# Altium PCB PCB.PcbDoc
Units mil, origin at the board's own origin, x right, y up, seen from the top; angles counter-clockwise.
Board outline 1476.38 x 748.48 mil, 2 copper layers (Top Layer, Bottom Layer); 14 components, 17 nets, 47 pads, 0 vias.
Unrouted connection lines stored in the file: 31.
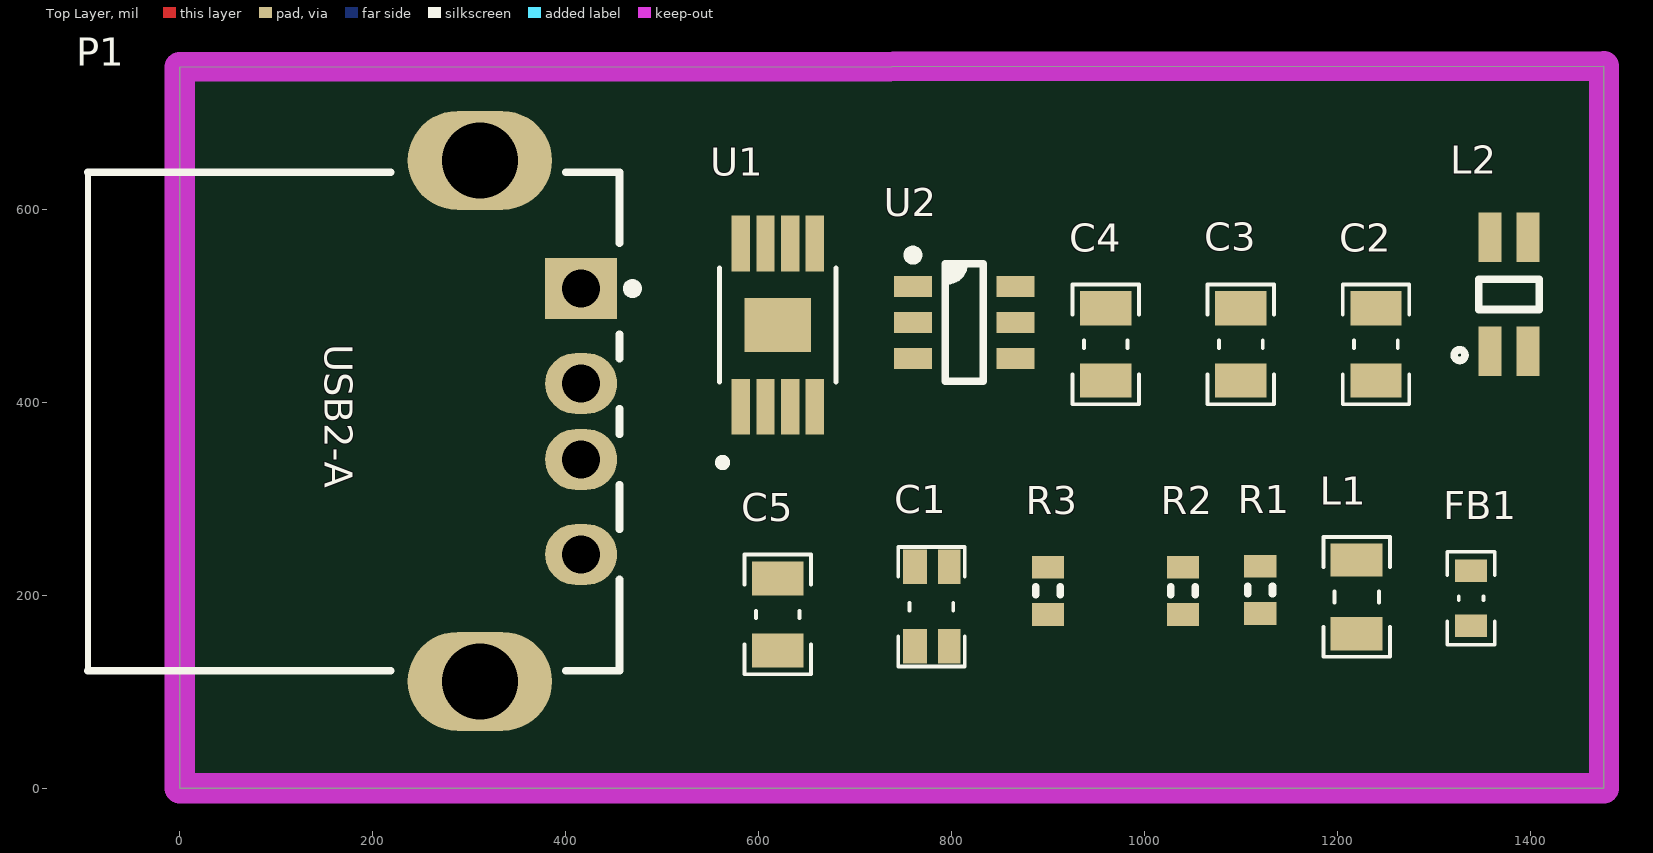
[diagram p0: Top Layer view]
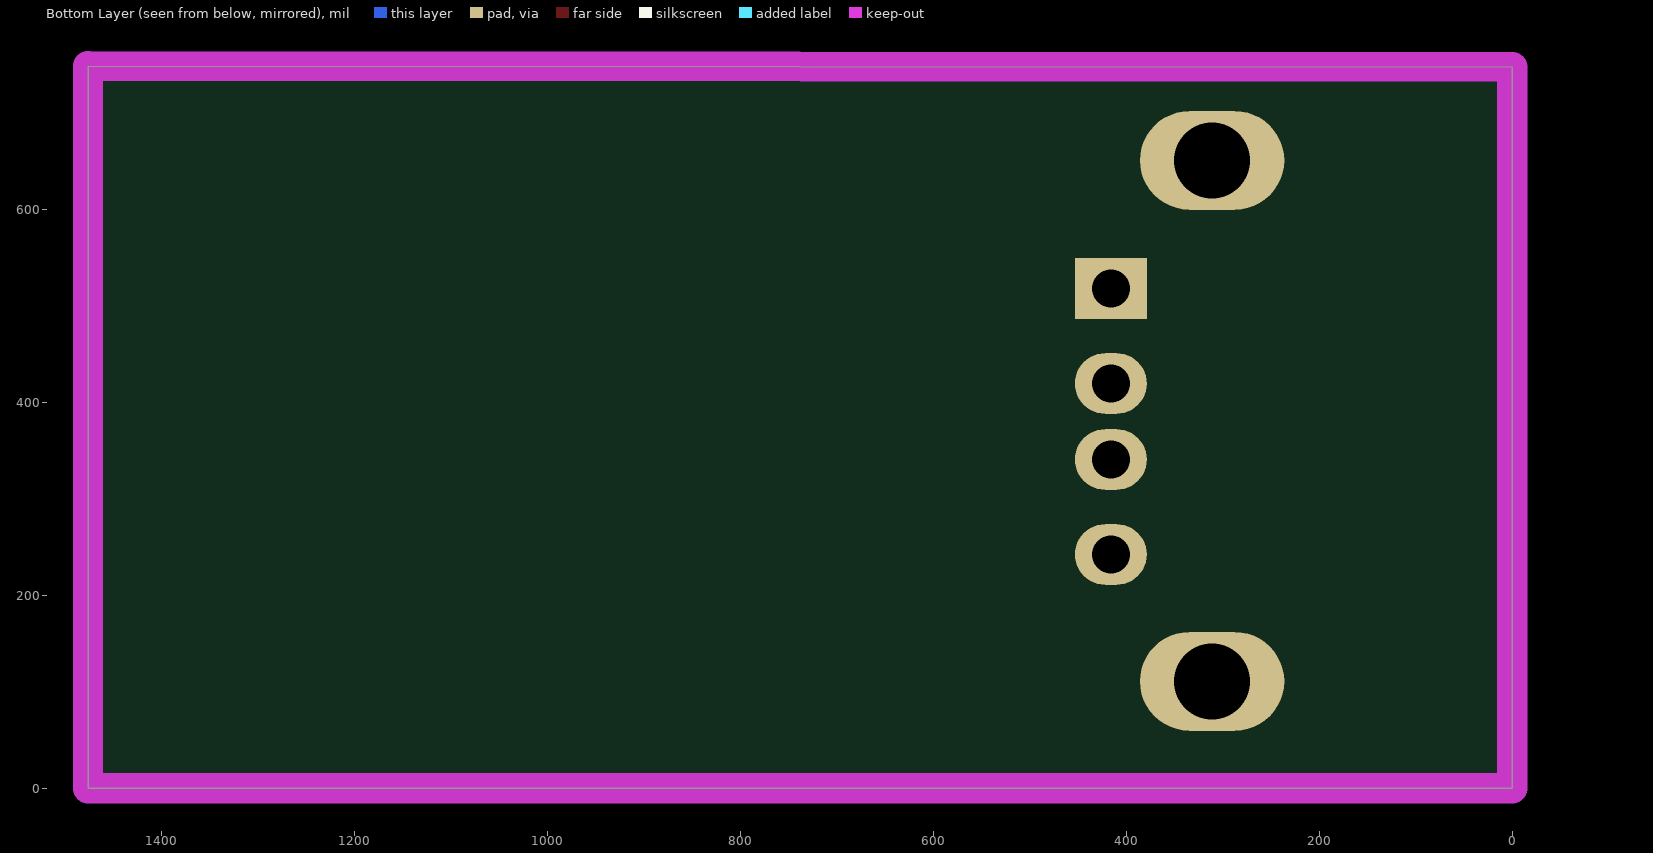
[diagram p1: Bottom Layer view, seen from below]

## Layer stack, top to bottom
Top Solder: solder mask 0.4, Solder Resist, Dk 3.5
Top Layer: signal copper 1.4
Dielectric 1: dielectric 12.6, FR-4, Dk 4.8
Bottom Layer: signal copper 1.4
Bottom Solder: solder mask 0.4, Solder Resist, Dk 3.5

## Board outline
0,0 0,747.46 1476.38,748.48 1476.38,0

## Design rules (kind name [scope] priority, off if disabled: settings)
Clearance [All] p1: gap=6 ignorepadtopadclearanceinfootprint=TRUE except(0: Arc-Hole Track-Hole SMDPad-Hole THPad-Hole Via-Hole Fill-Hole Poly-Hole Region-Hole Text-Hole)
DiffPairsRouting [All] p1: maxlimit=10 minlimit=10 mostfreqgap=10 substack1={008B043B-99C8-4B85-BA06-E00815DD0703} toplayer_{008b043b-99c8-4b85-ba06-e00815dd0703}_minwidth=15 toplayer_{008b043b-99c8-4b85-ba06-e00815dd0703}_maxwidth=15 toplayer_{008b043b-99c8-4b85-ba06-e00815dd0703}_prefwidth=15 bottomlayer_{008b043b-99c8-4b85-ba06-e00815dd0703}_minwidth=15 bottomlayer_{008b043b-99c8-4b85-ba06-e00815dd0703}_maxwidth=15 bottomlayer_{008b043b-99c8-4b85-ba06-e00815dd0703}_prefwidth=15 toplayer_minwidth=8 toplayer_maxwidth=15 toplayer_prefwidth=15 bottomlayer_minwidth=8 bottomlayer_maxwidth=15 bottomlayer_prefwidth=15 substack2={6B2CEA5B-5D47-4527-8B06-B0CC68312985} toplayer_{6b2cea5b-5d47-4527-8b06-b0cc68312985}_minwidth=15 toplayer_{6b2cea5b-5d47-4527-8b06-b0cc68312985}_maxwidth=15 toplayer_{6b2cea5b-5d47-4527-8b06-b0cc68312985}_prefwidth=15 bottomlayer_{6b2cea5b-5d47-4527-8b06-b0cc68312985}_minwidth=15 bottomlayer_{6b2cea5b-5d47-4527-8b06-b0cc68312985}_maxwidth=15 bottomlayer_{6b2cea5b-5d47-4527-8b06-b0cc68312985}_prefwidth=15 maxuncoupledlength=1
HoleSize [All] p1: absolutevalues=TRUE maxlimit=1968.5 minlimit=1 maxpercent=80.000 minpercent=20.000
PlaneClearance [All] p1: clearance=10
PolygonConnect [All] p1: connectstyle=Direct reliefconductorwidth=10 reliefentries=4 polygonreliefangle="90 Angle" airgapwidth=10
RoomDefinition USB [InComponentClass('USB')] p1: confinementstyle=ConfineIn formatcopy=TRUE lockcomponents=FALSE outline 0,750 0,0 1480,0 1480,750
RoutingVias [All] p1: holewidth=16 width=28 viastyle="Through Hole" minholewidth=8 minwidth=16 maxholewidth=28 maxwidth=50
ShortCircuit [All] p1: allowed=TRUE
SilkToSilkClearance [All] p1: silktosilkclearance=2
SilkToSolderMaskClearance [IsPad] p1: minsilkscreentomaskgap=1 clearancetoexposedcopper=TRUE
SolderMaskExpansion [All] p1: expansion=4 istentingtop=FALSE
Width [All] p1: maxlimit=200 minlimit=11 preferedwidth=16 substack1={008B043B-99C8-4B85-BA06-E00815DD0703} substack2={6B2CEA5B-5D47-4527-8B06-B0CC68312985}
24 further rules are at their usual default settings.

## Classes and differential pairs
net class Undefined: NetR3_2 USB0_N USB0_P USB0_PWR
differential pair USB0: +USB0_P -USB0_N

## Components (designator, comment, footprint, x,y, rotation, side; value= is the part's Value field where it differs from the comment)
C1 "10uF" "CAP0805 - Low Noise" 779.25,188.05 r90 top
C2 "100nF" CAP0805 1240,460 r90 top
C3 "100uF" CAP0805 1100,460 r90 top
C4 "100nF" CAP0805 960,460 r90 top
C5 "100nF" CAP0805 620,180 r90 top
FB1 "742792651" FB0603 1338.58,196.85 r90 top
L1 "100uh" IND0805 1220,198.19 r270 top
L2 "744232090" IND_744232090 1377.95,511.81 r90 top
P1 "USB Connector" "USB2.5-2H4C Flash" 200,380 r180 top
R1 "5K" RES0603 1120,181.01 r90 top
R2 "10K" RES0603 1040,180 r90 top
R3 "10K" RES0603_(1608X06L) 900,180 r90 top
U1 "TPS2051 (DGN)" *SOP65P490X110-9N_PMIC-TPS2051BDGN(MSOP8)(Primary) 620,480 r90 top
U2 "TVS USBLC6P6" "TI SOT-23-6 DBV" 813.15,482.6 r0 top

## Footprints (in the part's own frame and the unit in brackets; to place one, negate y for a bottom-side part, rotate by r counter-clockwise, add the part's x,y. Pads: shape width x height; smd on the part's side, far side on the other; paste and mask are expansions set on the pad)
*SOP65P490X110-9N_PMIC-TPS2051BDGN(MSOP8)(Primary) [mm]
  rect 1.47x0.48 smd: 1(-2.15,0.975) 2(-2.15,0.325) 3(-2.15,-0.325) 4(-2.15,-0.975) 5(2.15,-0.975) 6(2.15,-0.325) 7(2.15,0.325) 8(2.15,0.975)
  rect 1.425x1.76 smd: 9(0,0)
  silkscreen extent -3.72,-1.54 1.5,1.55, body extent -2.45,-1.5 2.45,1.5, height 1.1
CAP0805 [mm] "Chip Capacitor, 2-Leads, Body 2/00x1/25mm, IPC Medium Density DESIGNER:ABBAS BASEREH"
  rect 0.9x1.35 smd: 1(-0.95,0) 2(0.95,0)
  silkscreen extent -1.58,-0.87 1.58,0.87, body extent -1.02,-0.65 1.02,0.65, height 0.5
"CAP0805 - Low Noise" [mm] "Chip Capacitor, 2-Leads, Body 2/00x1/25mm, IPC Medium Density DESIGNER:ABBAS BASEREH"
  rect 0.9x0.63 smd: 1(-1.041,0.432) 2(1.05,0.432)
  rect 0.9x0.6 smd: 3(-1.041,-0.468) 4(1.05,-0.468)
  silkscreen extent -1.58,-0.87 1.58,0.87, body extent -1.02,-0.65 1.02,0.65, height 0.5
FB0603 [mm] "Ferrite Chip Bead SMD 0603-Design:Ali Hafizi"
  rect 0.6x0.85 smd: 1(-0.725,0) 2(0.725,0)
  silkscreen extent -1.22,-0.62 1.22,0.63, body extent -0.81,-0.4 0.79,0.4, height 0.8
IND0805 [mm] "Chip Inductor, 2-Leads, Body 2/00x1/25mm, IPC Medium Density DESIGNER:ABBAS BASEREH"
  rect 0.87x1.37 smd: 1(-0.97,0) 2(0.97,0)
  silkscreen extent -1.58,-0.87 1.58,0.87, body extent -1.02,-0.65 1.02,0.65, height 0.5
IND_744232090 [mm]
  rect 1.3x0.6 smd: 1(-1.5,0.5) 2(1.5,0.5) 3(1.5,-0.5) 4(-1.5,-0.5)
  silkscreen extent -1.74,-0.8 0.4,1.44
RES0603 [mm] "Chip Resistor, 2-Leads, Body 1.6x0.8mm, IPC High Density _ (0.063W)"
  rect 0.6x0.85 smd: 1(0,0) 2(1.244,0)
  silkscreen extent 0.52,-0.33 0.72,0.33, body extent -0.14,-0.38 1.38,0.38, height 0.45
RES0603_(1608X06L) [mm] "Chip Resistor, 2-Leads, Body 1.6x0.8mm, IPC High Density _ (0.063W)"
  rect 0.6x0.85 smd: 1(0,0) 2(1.244,0)
  silkscreen extent 0.52,-0.33 0.72,0.33, body extent -0.14,-0.38 1.38,0.38, height 0.45
"TI SOT-23-6 DBV" [mm] "SOT23, 6-Leads, Body 2.90x2.80mm, Pitch 0.95mm, IPC Medium Density"
  rect 1x0.55 smd: 1(-1.35,0.95) 2(-1.35,0) 3(-1.35,-0.95) 4(1.35,-0.95) 5(1.35,0) 6(1.35,0.95)
  silkscreen extent -1.47,-1.55 0.5,1.9, body extent -1.44,-1.53 1.44,1.52, height 1.45
"USB2.5-2H4C Flash" [mm] "Connector; USB1.1, Type A, Thru-Hole; 4 Position; Right Angle DESIGNER ABBAS BASEREH"
  rect 1.9x1.6 hole 1: 1(-5.49,-3.5)
  oval 1.9x1.6 hole 1: 2(-5.49,-1) 3(-5.49,1) 4(-5.49,3.5)
  oval 3.8x2.6 hole 2: 4(-2.823,6.842) 4(-2.823,-6.874)
  silkscreen extent -6.97,-6.57 7.49,6.57, body extent -6.9,-7.9 7.6,7.9, height 8

## Part data
C1: library part "Capacitor Low Noise", "Capacitor Ceramic", 0-value=10uf, 1-Package=CAP0805, 0-Designer="Telegram: @PATARM"
C2 C3 C4 C5: library part "Capacitor SMD", "Capacitor SMD", Data=2017-3-10, Desc.="CAP SMD TOTAL PACKAGES", Designer="Abbas Basereh"
FB1: "600 Ohms @ 100MHz 1 Signal Line Ferrite Bead 0603 (1608 Metric) 1A 200mOhm", Package="0603 Wurth Electronics", Availability=Warning, Check_prices=https://www.snapeda.com/parts/742792651/Wurth%20Electronics%20Inc./view-part/445402/?ref=eda, MF="Wurth Electronics", MP=742792651, Price=None, Purchase-URL=https://pricing.snapeda.com/search/part/742792651/?ref=eda, SnapEDA_Link=https://www.snapeda.com/parts/742792651/Wurth%20Electronics%20Inc./view-part/445402/?ref=snap
L1: library part "INDUCTOR SMD PACKAGE", "TOTAL INDUCTOR SMD PACK", Data=2017-3-10, Desc.="INDUCTOR  SMD TOTAL PACKAGES", Designer="Abbas Basereh"
L2: "2 Line Common Mode Choke Surface Mount 90 Ohms @ 100MHz 370mA DCR 300mOhm", Package="Horizontal-4 Wurth", Digi-Key_Part_Number=732-1469-1-ND, Digi-Key_Purchase_URL=https://www.digikey.com/product-detail/en/w-rth-elektronik/744232090/732-1469-1-ND/1639481?utm_source=snapeda&utm_medium=aggregator&utm_campaign=symbol, MF="Wurth Electronics", MP=744232090, SnapEDA_Link=https://www.snapeda.com/parts/744232090/Wurth%20Electronics%20Inc./view-part/524159/?ref=snap
P1: library part "USB A-Type case", "USB Connector-A Type"
R1 R2 R3: library part Resistor, "Resistor"
U1: library part TPS2061_0, "IC 1.5A PWR DIST SWITCH 8-SOIC", Current Limit=1A, Manufacturer="Texas Instruments", Manufacturer Part Number=TPS2051BDGNR, Operating Temperature="-40°C ~ 85°C", Package / Case="8-TSSOP, 8-MSOP (0.118\", 3.00mm Width) Exposed Pad", Supplier Device Package=8-MSOP-PowerPad, Supplier Part Number 1=296-17313-6-ND, Voltage - Input="2.7 V ~ 5.5 V", Category="Integrated Circuits (ICs)", ComponentLink1Description=http://www.ti.com/lit/ds/symlink/tps2051b.pdf, ComponentLink1URL=http://www.ti.com/lit/ds/symlink/tps2051b.pdf, Internal Switch(s)=Yes, Mounting Type="Surface Mount", Number of Outputs=1, Packaging=Digi-Reel®, Pricing 1="1=1.82, 10=1.642, 25=1.4708, 100=1.3224, 250=1.1742, 500=1.026, 1000=0.8493 (USD)", Rds (On)="135 mOhm", RoHS="RoHS Compliant", Stock 1=7065, Supplier 1=Digi-Key, Type="High Side Switch"
U2: "HIGH DENSITY MOUNTING PHOTOTRANSISTOR OPTICALLY COUPLED ISOLATORS", Company="IPA Co.", Creation Date=1387-1-26, Creator="Saeid Jorablo"

## Nets (pads, with @x,y where several pads share a name; then routed paths per layer and width w, separated by ;. In a path a pad name is that pad's centre, name@x,y a point inside that pad or via, vN(x,y) a via of type N, cw(c..) or ccw(c..) an arc to the next point about the centre after c; other vN are vias at no path point)
+5V: L1.1
EARTH: 
GND: C1.4 R3.1
GND_USB0: C1.2 C2.1 C3.1 C4.1 C5.1 P1.4 R2.2 U1.1 U1.9 U2.2
NetC1_1: C1.1 U1.2 U1.3
NetC1_3: C1.3 L1.2
NetC2_2: C2.2 C3.2 FB1.2 P1.1
NetC5_2: C5.2 FB1.1 U1.6 U1.7 U1.8 U2.5
NetL2_1: L2.1 U2.3
NetL2_4: L2.4 U2.1
NetP1_2: P1.2 U2.6
NetP1_3: P1.3 U2.4
NetR1_1: R1.1 U1.5
NetR3_2: R3.2
USB0_N: L2.2
USB0_P: L2.3
USB0_PWR: C4.2 R1.2 R2.1 U1.4

## Keep-outs
Keep-Out Layer:
  the board outline again, w31.5

## Silkscreen, mask and mechanical layers (free items; w line width, h text height)
Top Overlay:
  text "https://github.com/PAT-IOT" at -10,760 h150

## Text inside footprints (layer, text, board x,y; h text height)
P1: Top Overlay "USB2-A" at 140.6,460 h50 r270